# Altium PCB Steering_Daughterboard.PcbDoc
Units mil, origin at the board's own origin, x right, y up, seen from the top; angles counter-clockwise.
Board outline 1929 x 2346 mil, 2 copper layers (Top Layer, Bottom Layer), stack 60.4 mil thick; 6 components, 9 nets, 44 pads, 0 vias.
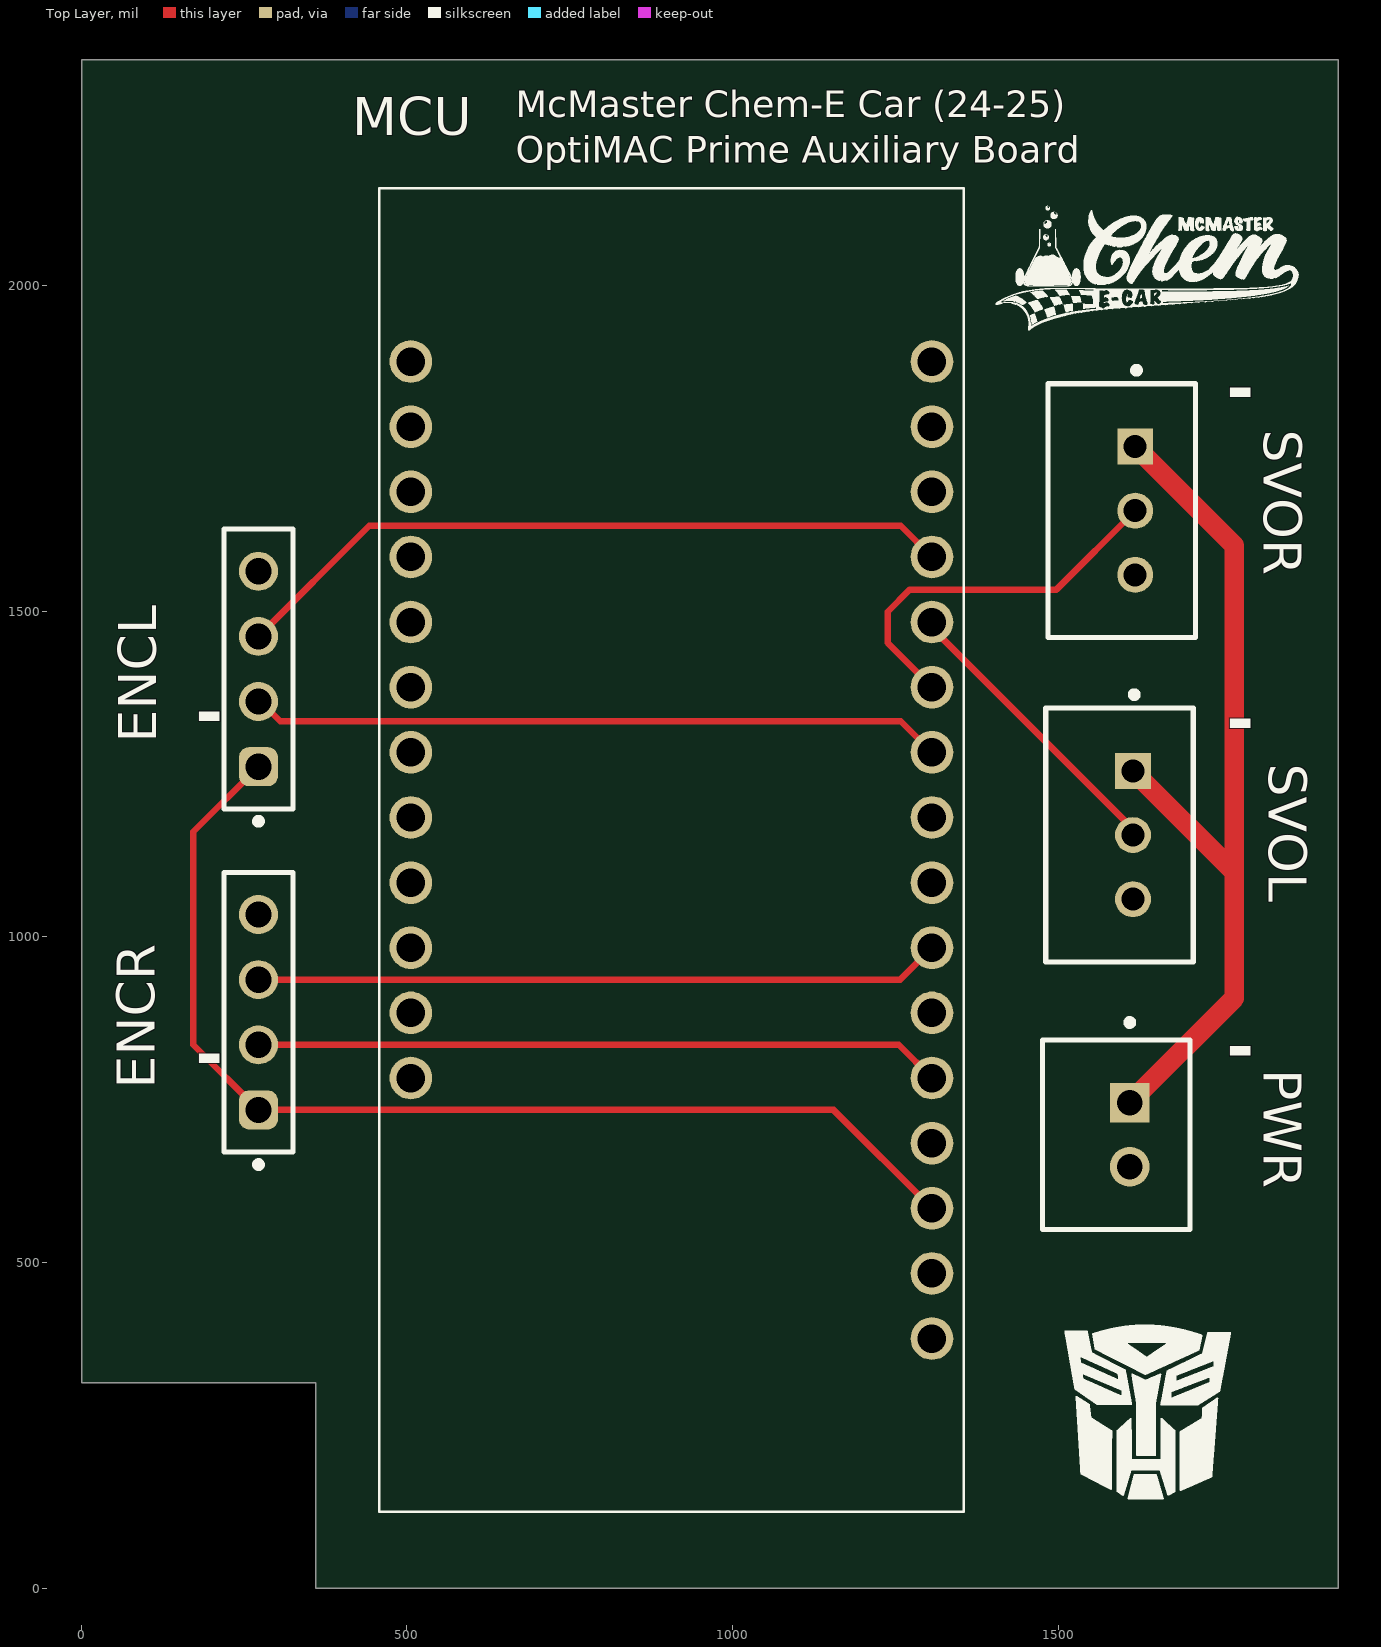
[diagram p0: Top Layer view]
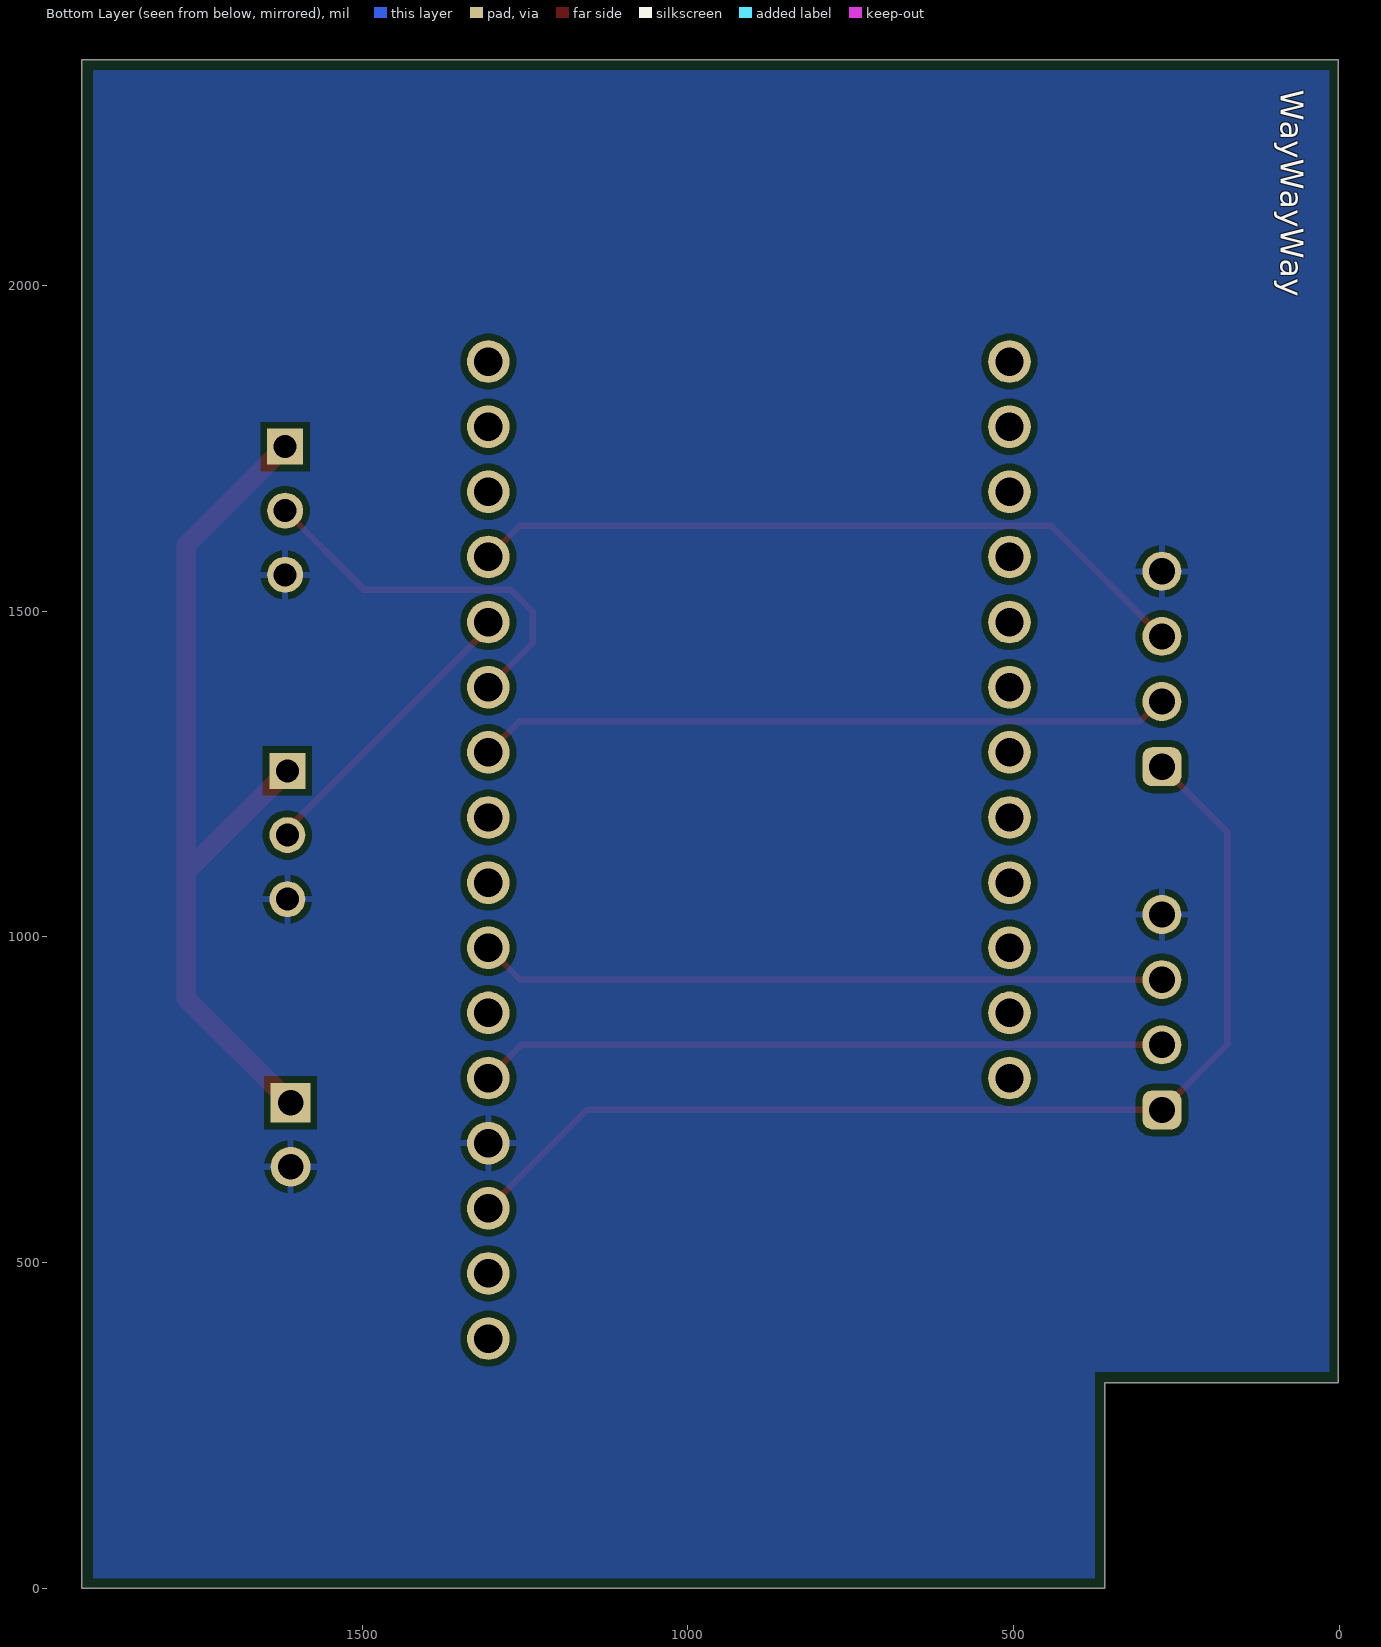
[diagram p1: Bottom Layer view, seen from below]
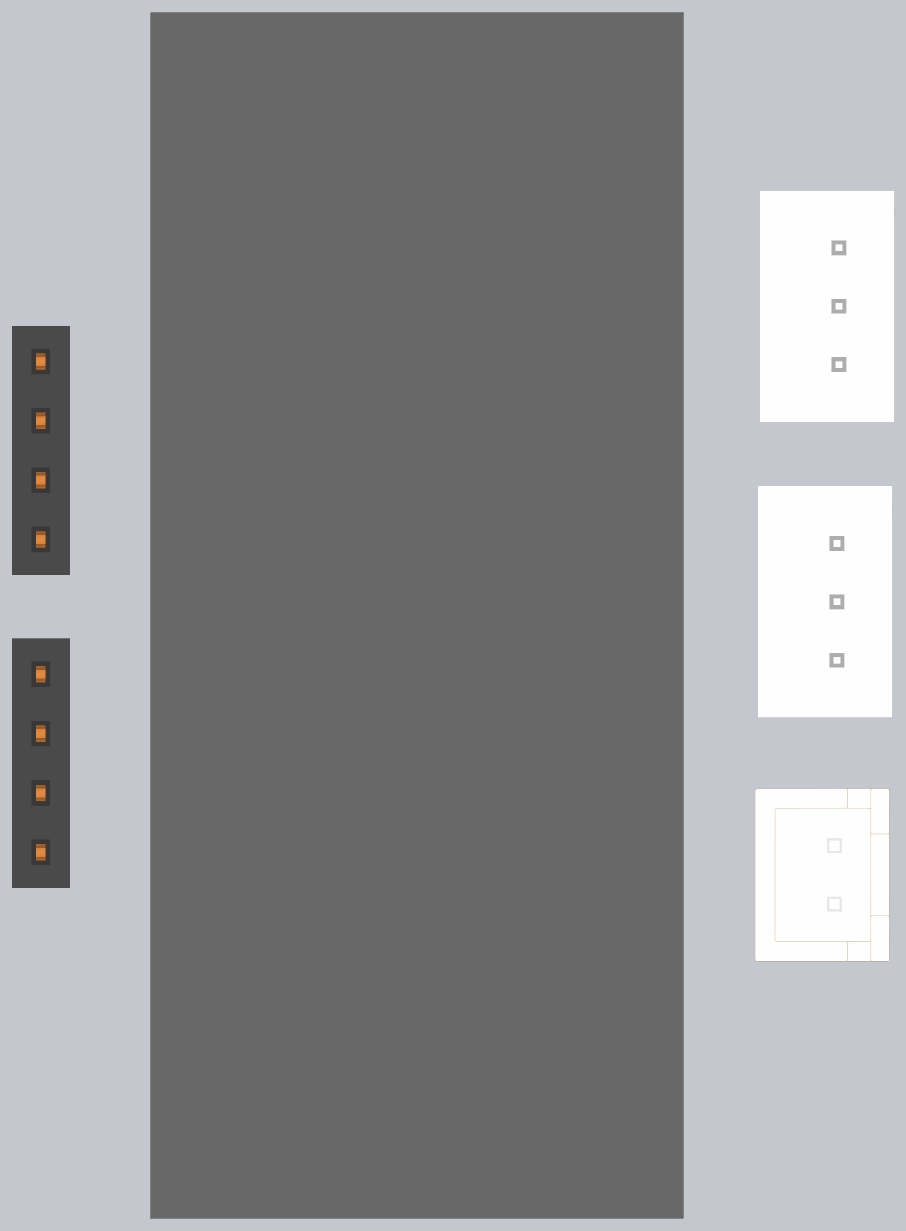
[diagram p2: 3D render of the assembled board from above, using the file's embedded part models]

## Layer stack, top to bottom
Top Solder: solder mask 0.5, Solder Resist, Dk 3.3
Top Layer: signal copper 0.7
Dielectric1: core 59, FR-4, Dk 4.3
Bottom Layer: signal copper 0.7
Bottom Solder: solder mask 0.5, Solder Resist, Dk 3.3

## Board outline
1,315 360,315 360,0 1930,0 1930,2346 1,2346

## Design rules (kind name [scope] priority, off if disabled: settings)
Clearance [All] p1: gap=10 ignorepadtopadclearanceinfootprint=FALSE
DiffPairsRouting [All] p1: maxlimit=10 minlimit=10 mostfreqgap=10 toplayer_minwidth=10 toplayer_maxwidth=10 toplayer_prefwidth=10 bottomlayer_minwidth=10 bottomlayer_maxwidth=10 bottomlayer_prefwidth=10 maxuncoupledlength=500
HoleSize [All] p1: absolutevalues=TRUE maxlimit=300 minlimit=10 maxpercent=80.000 minpercent=20.000
MinimumAnnularRing [All] p1: minimumring=9
PasteMaskExpansion [All] p1: expansion=10
PlaneClearance [All] p1: clearance=15
PlaneConnect [All] p1: pad.planeconnectstyle=Relief pad.reliefexpansion=20 pad.reliefentries=4 pad.reliefconductorwidth=10 pad.reliefairgap=10 via.planeconnectstyle=Direct via.reliefexpansion=20 via.reliefentries=4 via.reliefconductorwidth=10 via.reliefairgap=10
PolygonConnect [All] p1: thpad.connectstyle=Relief thpad.reliefconductorwidth=10 thpad.reliefentries=4 thpad.polygonreliefangle="90 Angle" thpad.airgapwidth=10 smdpad.connectstyle=Relief smdpad.reliefconductorwidth=10 smdpad.reliefentries=4 smdpad.polygonreliefangle="90 Angle" smdpad.airgapwidth=10 via.connectstyle=Direct via.reliefconductorwidth=10 via.reliefentries=4 via.polygonreliefangle="90 Angle" via.airgapwidth=10
RoutingVias [All] p1: holewidth=10 width=20 viastyle="Through Hole" minholewidth=10 minwidth=20 maxholewidth=10 maxwidth=20
SMDNeckDown [All] p1: percent=100.000
SilkToSolderMaskClearance SilkscreenOverComponentPads [IsPad] p1: minsilkscreentomaskgap=10 clearancetoexposedcopper=TRUE
SolderMaskExpansion [All] p1: expansion=10 istentingtop=FALSE
SupplyNets "Schematic Supply Nets" [InNet('GND')] p1: voltage=0.000
Width [All] p1: maxlimit=40 minlimit=10 preferedwidth=10
24 further rules are at their usual default settings.

## Components (designator, comment, footprint, x,y, rotation, side; value= is the part's Value field where it differs from the comment)
ENCL "61300411821" 61300411821 272,1411 r90 top
ENCR "61300411821" 61300411821 272,884 r90 top
MCU "Feather RP2040 Adalogger" 2796 1306,383 r90 top (schematic designator MCUS)
PWR "B2B-XH-A(LF)(SN)" FP-B2B-XH-A_LF_SN-MFG 1589,696 r270 top
SVOL "B3B-XH-A(LF)(SN)" FP-B3B-XH-A_LF_SN-MFG 1593.92,1156 r270 top
SVOR "B3B-XH-A(LF)(SN)" FP-B3B-XH-A_LF_SN-MFG 1597.33,1654 r270 top

## Footprints (in the part's own frame and the unit in brackets; to place one, negate y for a bottom-side part, rotate by r counter-clockwise, add the part's x,y. Pads: shape width x height; smd on the part's side, far side on the other; paste and mask are expansions set on the pad)
2796 [mm]
  round 1.665 hole 1.11: 1(10.16,20.32) 2(12.7,20.32) 3(15.24,20.32) 4(17.78,20.32) 5(20.32,20.32) 6(22.86,20.32) 7(25.4,20.32) 8(27.94,20.32) 9(30.48,20.32) 10(33.02,20.32) 11(35.56,20.32) 12(38.1,20.32) 13(38.1,0) 14(35.56,0) 15(33.02,0) 16(30.48,0) 17(27.94,0) 18(25.4,0) 19(22.86,0) 20(20.32,0) 21(17.78,0) 22(15.24,0) 23(12.7,0) 24(10.16,0) 25(7.62,0) 26(5.08,0) 27(2.54,0) 28(0,0)
  silkscreen extent -6.75,-1.24 44.85,21.56, body extent -6.75,-1.24 44.85,21.56, height 8.1
61300411821 [mm] "Socket Header, Pitch 2.54 mm, THT, Vertical, single row, 4p"
  rrect50% 1.52x1.52 hole 1.02: 1(-3.81,0)
  round 1.52 hole 1.02: 2(-1.27,0) 3(1.27,0) 4(3.81,0)
  silkscreen extent -6.06,-1.35 5.46,1.35, body extent -5.33,-1.25 5.33,1.25, height 8.55
FP-B2B-XH-A_LF_SN-MFG [mm]
  rect 1.55x1.55 hole 1 paste-2539.97 mask+0: 1(-1.25,0.525)
  round 1.55 hole 1 paste-2539.97 mask+0: 2(1.25,0.525)
  silkscreen extent -4.5,-2.88 3.7,2.88, body extent -3.8,-2.98 3.8,2.98, height 0.25
FP-B3B-XH-A_LF_SN-MFG [mm]
  rect 1.4x1.4 hole 0.9 paste-2539.97 mask+0: 1(-2.5,0.525)
  round 1.4 hole 0.9 paste-2539.97 mask+0: 2(0,0.525) 3(2.5,0.525)
  silkscreen extent -5.6,-2.88 4.95,2.88, body extent -5.05,-2.98 5.05,2.98, height 0.25

## Part data
ENCL ENCR: library part CMP-1502-01316-3, Contact Resistance=20mΩ, Current Rating=3A, Operating Supply Voltage=250V, Gender=Female, Lead Pitch=2.54mm, NexarPartId=61924712, Number of Pins=4, Orientation=Vertical, RoHS=Non-Compliant
MCU: library part 2796, "Adafruit Microcontroller", Arrow Part Number=4884, Manufacturer_Name=Adafruit, Mouser Part Number=485-5980, Arrow Price/Stock=https://www.arrow.com/en/products/4884/adafruit-industries, Datasheet Link=https://learn.adafruit.com/adafruit-feather-rp2040-adalogger/, Height=8mm, Manufacturer_Part_Number=4884, Mouser Price/Stock=https://www.mouser.com/ProductDetail/Adafruit/5980?qs=IKkN%2F947nfCnlS5PgbpnkA%3D%3D
PWR: library part CMP-2000-05888-3, "CONN HEADER VERT 2POS 2.5MM", Color=Natural, Contact Resistance=20mR, Current Rating=3A, Housing Color=White, Insulation Resistance=1GR, Max Operating Temperature=85°C, Max Voltage Rating (AC)=250V, Min Operating Temperature=-25°C, Connector Type="Male Pin", Contact Material=Brass, Contact Plating=Tin, Contact Type="Male Pin", Depth=5.75mm, Fastening Type=Detent, Housing Material=Polyamide, Lead Free="Lead Free", Lead Pitch=2.5mm, Length=7.4mm, Max Current Rating=3A, Max Voltage Rating (DC)=250V, Mount="Through Hole", Number of Contacts=2, Number of Positions=2, Number of Rows=1, Orientation=Straight, Packaging=Bulk, Pitch=2.5mm, REACH SVHC="No SVHC", Series=XH, Termination=Solder, Voltage Rating=250V, Voltage Rating (AC)=250V, Wire/Cable Gauge=22AWG
SVOL SVOR: library part CMP-17439-000014-3, "CONN HEADER VERT 3POS 2.5MM", Color=Natural, Contact Resistance=20mR, Current Rating=3A, Flammability Rating="UL94 V-0", Housing Color=White, Insulation Resistance=1GR, Max Operating Temperature=85°C, Max Voltage Rating (AC)=250V, Min Operating Temperature=-25°C, Connector Type=Header, Contact Finish - Mating=TIN, Contact Material=Brass, Contact Plating=Tin, Contact Shape=Square, Contact Type="Male Pin", Depth=5.75mm, Fastening Type=Detent, Gender=Male, Housing Material=Polyamide, Insulation Color=Natural, Insulation Material=Nylon, Lead Free="Lead Free", Lead Pitch=2.5mm, Length=9.9mm, Max Current Rating=3A, Max Voltage Rating (DC)=250V, Mount="Through Hole", Number of Contacts=3, Number of Positions=3, Number of Rows=1, Orientation=Straight, Packaging=Bulk, Pitch=2.5mm, REACH SVHC="No SVHC", Series=XH, Termination=Solder, Voltage Rating=250V, Voltage Rating (AC)=250V, Wire/Cable Gauge=22AWG

## Nets (pads, with @x,y where several pads share a name; then routed paths per layer and width w, separated by ;. In a path a pad name is that pad's centre, name@x,y a point inside that pad or via, vN(x,y) a via of type N, cw(c..) or ccw(c..) an arc to the next point about the centre after c; other vN are vias at no path point)
GND: ENCL.4 ENCR.4 MCU.25 PWR.2 SVOL.3 SVOR.3
NetENCL_1: ENCL.1 ENCR.1 MCU.26 | length 1706.4
  Top Layer w10: ENCL.1 172,1161 172,834 ENCR.1 1155,734 MCU.26
NetENCL_2: ENCL.2 MCU.19 | length 1066.3
  Top Layer w10: ENCL.2 275.08,1361 305.3,1330.78 1258.22,1330.78 MCU.19
NetENCL_3: ENCL.3 MCU.16 | length 1124.3
  Top Layer w10: ENCL.3 442,1631 1258,1631 MCU.16
NetENCR_2: ENCR.2 MCU.24 | length 1055.1
  Top Layer w10: ENCR.2 1255,834 MCU.24
NetENCR_3: ENCR.3 MCU.22 | length 1054.3
  Top Layer w10: ENCR.3 1257,934 MCU.22
NetMCUS_17: MCU.17 SVOL.2 | length 454.8
  Top Layer w10: MCU.17 1306,1473.8 1614.59,1165.2 SVOL.2
NetMCUS_18: MCU.18 SVOR.2 | length 588.4
  Top Layer w10: MCU.18 1238,1451 1238,1499 1272,1533 1497,1533 SVOR.2
NetPWR_1: PWR.1 SVOL.1 SVOR.1 | length 1356.4
  Top Layer w30.32: PWR.1 1770,905.54 1770,1099.02 ; SVOL.1 1770,1099.02 ; SVOR.1 1770,1600.43 1770,1099.02
pads on no net: MCU.1 MCU.2 MCU.3 MCU.4 MCU.5 MCU.6 MCU.7 MCU.8 MCU.9 MCU.10 MCU.11 MCU.12 MCU.13 MCU.14 MCU.15 MCU.20 MCU.21 MCU.23 MCU.27 MCU.28

## Polygon pours and split planes (outlines as drawn)
GND on Bottom Layer "GND_PLANE" (solid, pour order 0): 15,332 375,332 375,15 1913,15 1913,2328 1915,2330 15,2330

## Silkscreen, mask and mechanical layers (free items; w line width, h text height)
Top Overlay:
  drawing of 36 lines, arcs and shapes, not listed
  text "McMaster Chem-E Car (24-25) / OptiMAC Prime Auxiliary Board" at 667,2174 h70
  text "." at 1731,1734 h500
  text "." at 148,1236.3 h500
  text "." at 1731,1225.78 h500
  text "." at 1731,722.86 h500
  text "." at 148,711 h500
Bottom Overlay:
  text "WayWayWay" at 100.74,2300 h60 r90
Board:
  lines w10: 1,315 361.32,315 361.32,0 1930,0 1930,2346 1,2346 1,315